# EAGLE board Rocket_prototype (EAGLE 9.6.2)
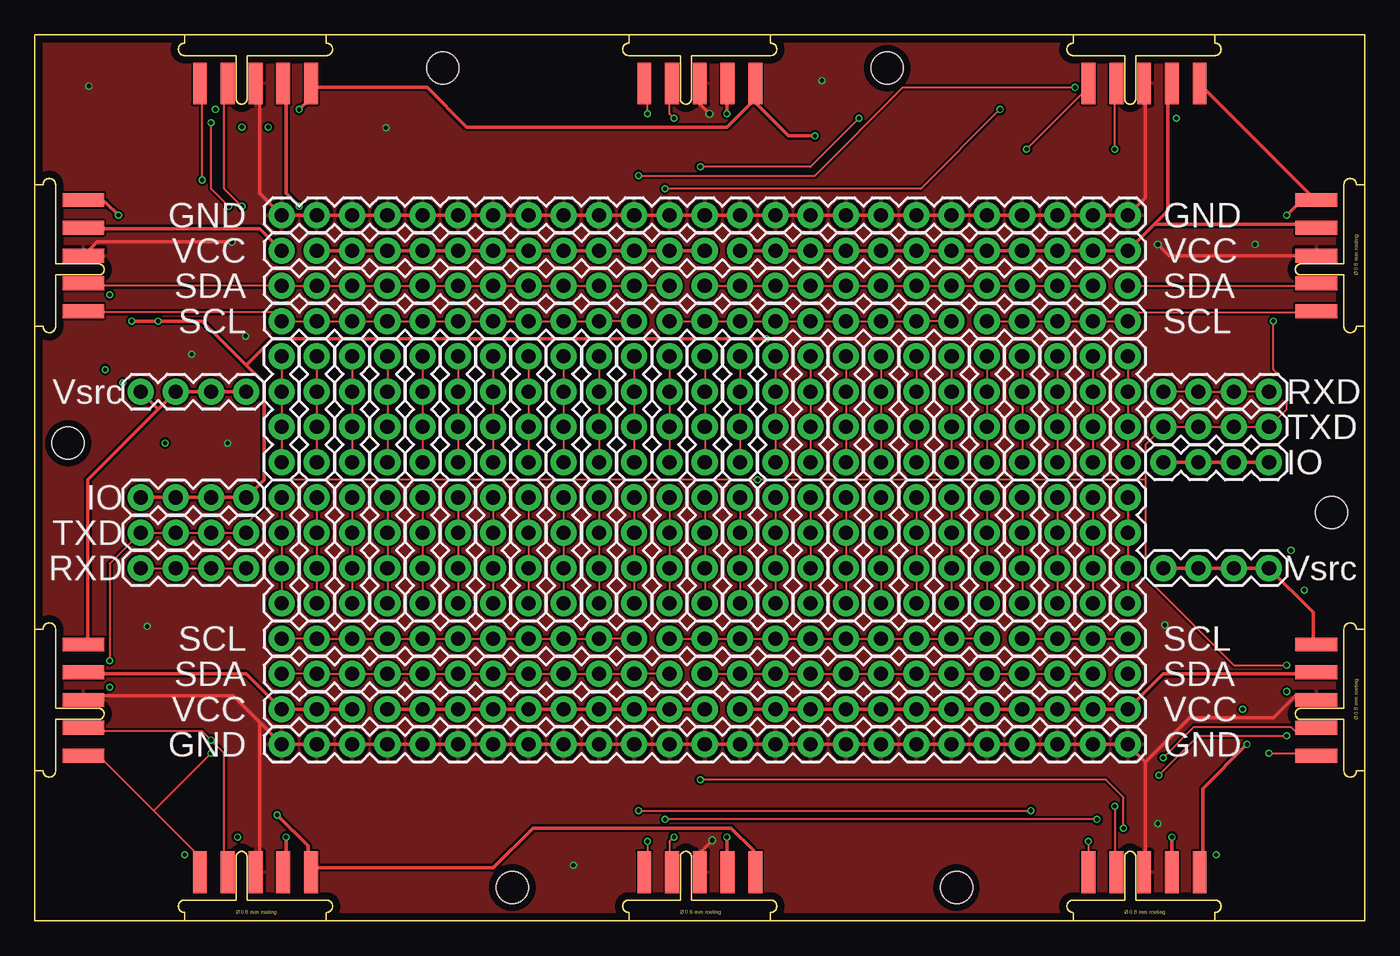
[diagram p0: board, top side]
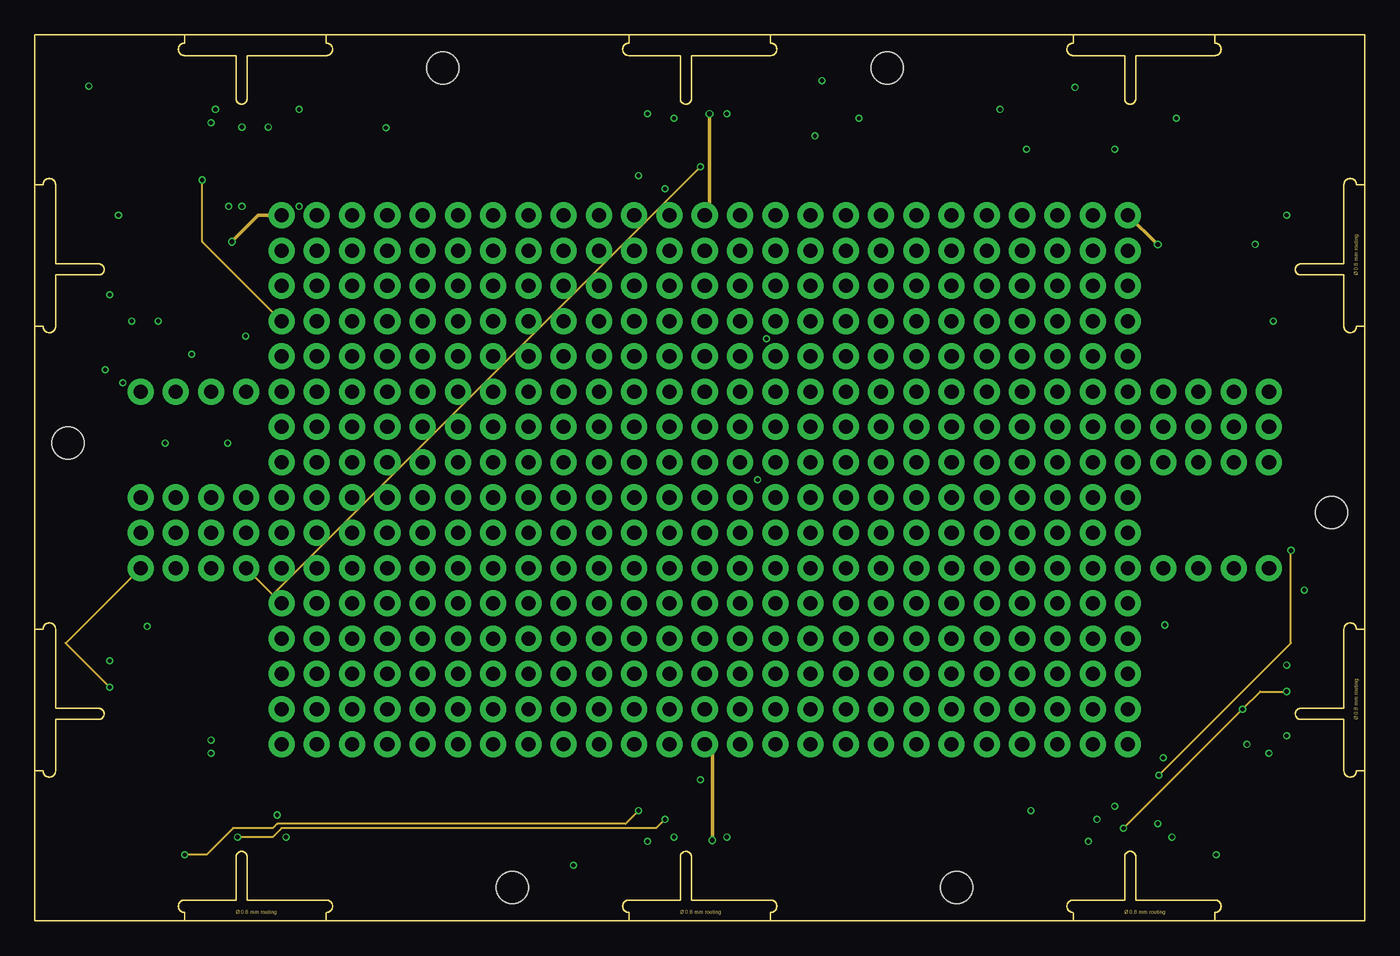
[diagram p1: board, inner layer Route2]
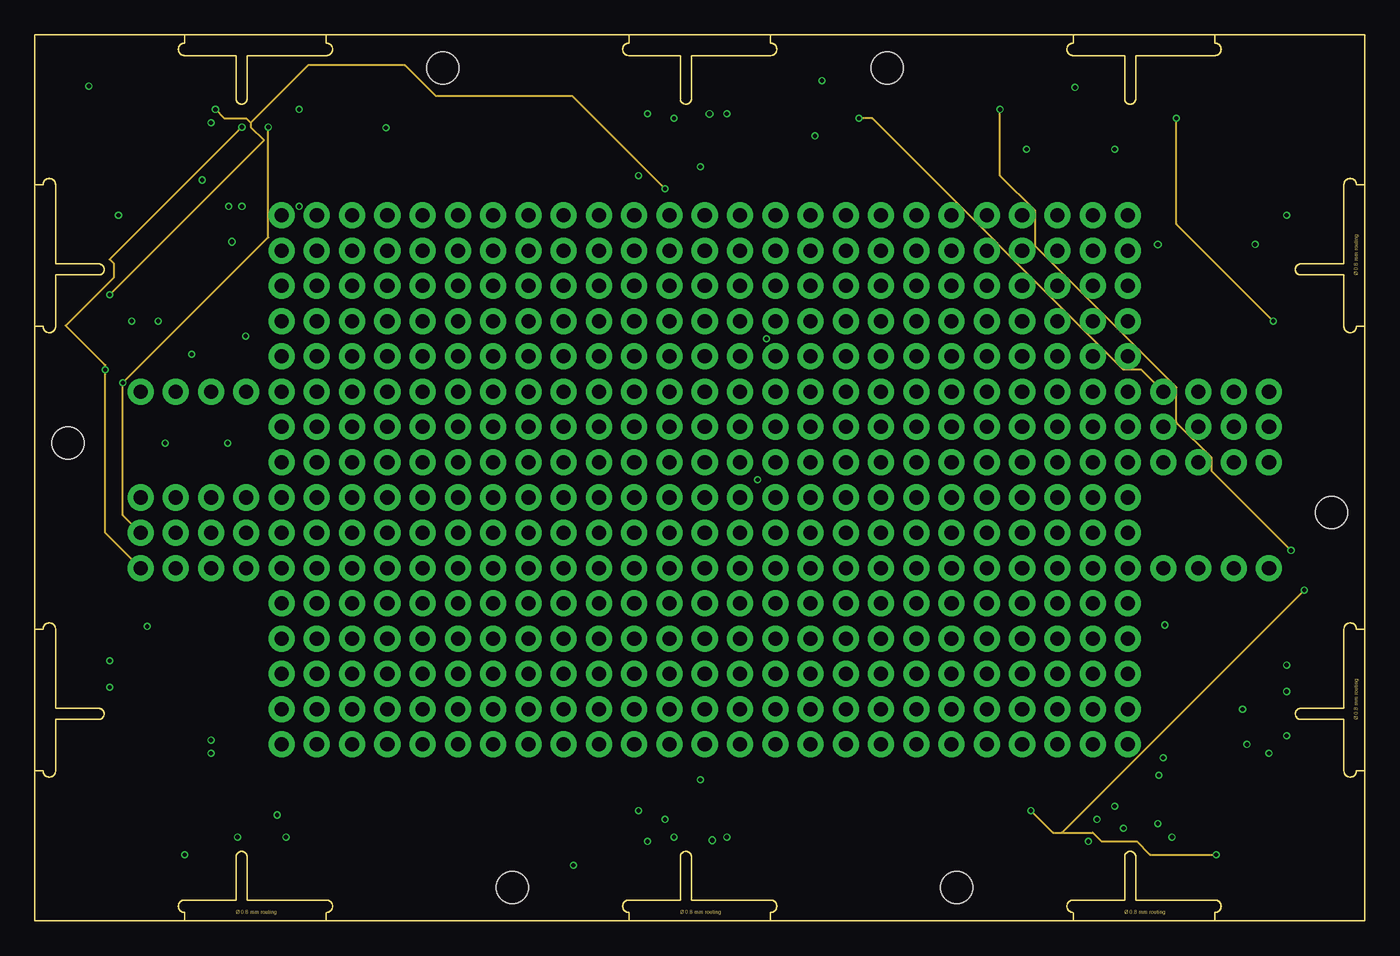
[diagram p2: board, inner layer Route15]
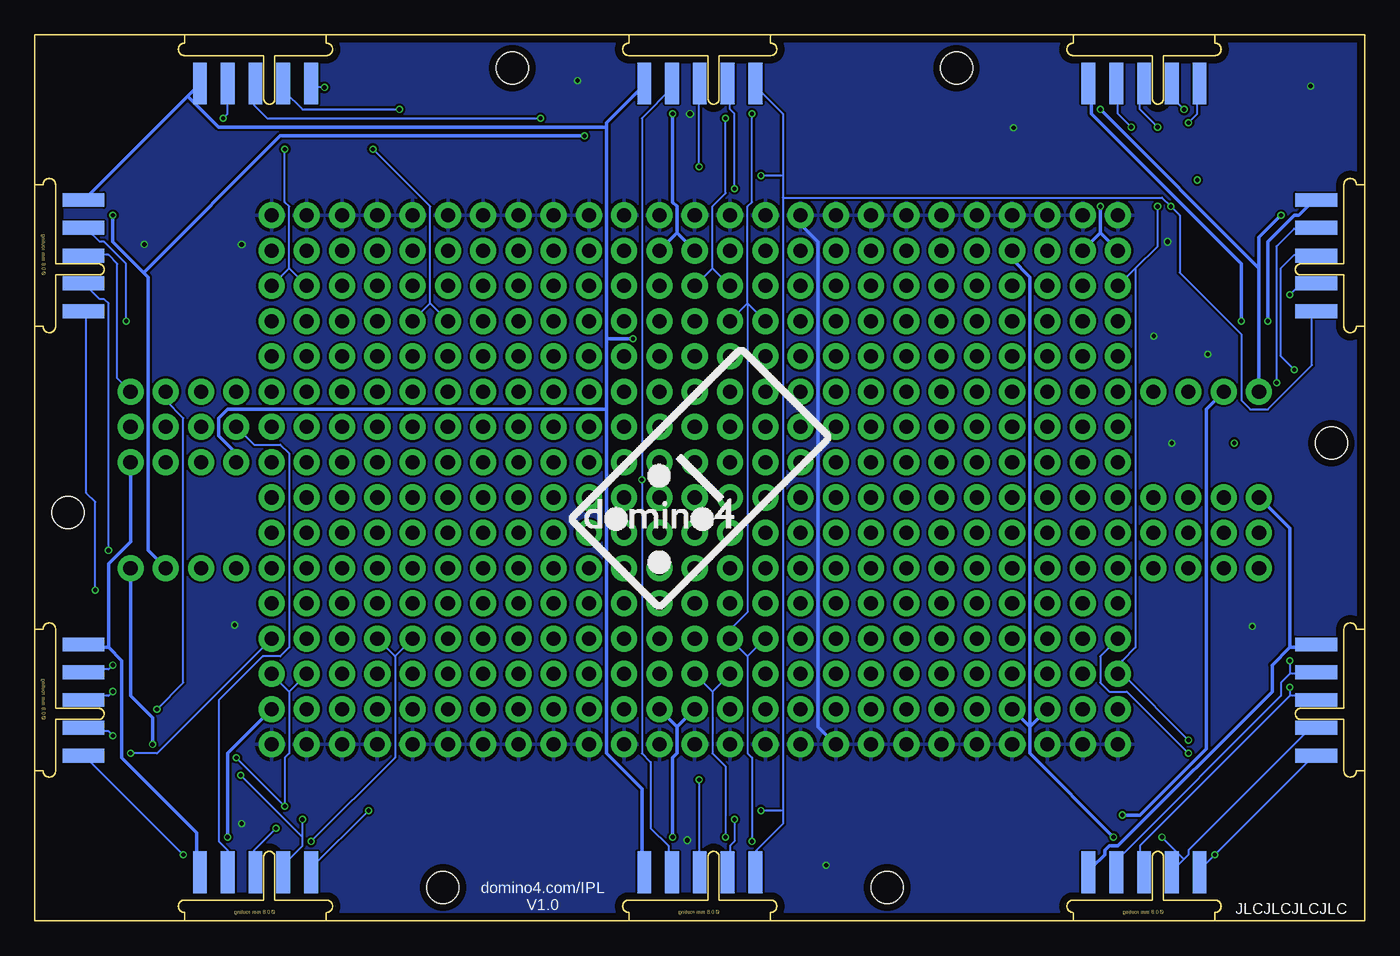
[diagram p3: board, bottom side, seen from below]

Size 95.8 x 63.8 mm. Coordinates in mm from the lower left corner, seen from the top.
Outline: 0,10.8 0,0 10.8,0
Outline: 21,0 42.8,0
Outline: 53,0 74.8,0
Outline: 85,0 95.8,0 95.8,10.8
Outline: 95.8,21 95.8,42.8
Outline: 95.8,53 95.8,63.8 85,63.8
Outline: 74.8,63.8 53,63.8
Outline: 42.8,63.8 21,63.8
Outline: 10.8,63.8 0,63.8 0,53
Outline: 0,42.8 0,21
Copper layers (1+2*15+16): Top 0.035mm / dielectric 0.2mm / Route2 0.0175mm / dielectric 1.065mm / Route15 0.0175mm / dielectric 0.2mm / Bottom 0.035mm
Design rules "jlcpcb4layer": minimum track width 3.5mil, minimum drill 12mil, track to track 3.5mil, track to pad 3.5mil, pad to pad 5mil, via to via 5mil, smd to smd 5mil, copper to edge 20mil, drill to drill 6mil, minimum pad ring 6mil, minimum via ring 4mil, stop-mask expansion 4mil, vias tented up to drill 12mil, thermal gap 10mil
Net classes: 0 default: width 0.152 mm, drill 0.305 mm, clearance 0.152 mm; 1 pwr: width 0.254 mm, drill 0.305 mm, clearance 0.152 mm
Holes 2.3 mm at 29.4,61.4 2.4,34.4 34.4,2.4 66.4,2.4 93.4,29.4 61.4,61.4
vRestrict: area 1,21.8 to 3.7,22.4
Milling: 4 lines

## Footprints (pad centres in the part's own frame; a part is rotated, then mirrored left to right if it is on the bottom)
1X04 = drill 1.016 pad 1.88: 1 0,0; 2 2.54,0; 3 5.08,0; 4 7.62,0
1X25 = drill 1.016 pad 1.88: 1 0,0; 2 2.54,0; 3 5.08,0; 4 7.62,0; 5 10.16,0; 6 12.7,0; 7 15.24,0; 8 17.78,0; 9 20.32,0; 10 22.86,0; 11 25.4,0; 12 27.94,0; 13 30.48,0; 14 33.02,0; 15 35.56,0; 16 38.1,0; 17 40.64,0; 18 43.18,0; 19 45.72,0; 20 48.26,0; 21 50.8,0; 22 53.34,0; 23 55.88,0; 24 58.42,0; 25 60.96,0
XIX_SINGLE_CON_RIGHT = smd 1 x 3: GND@4 0,-3.5; SCL@4 4,-3.5; SDA@4 2,-3.5; VBAT@4 -4,-3.5; VCC@4 -2,-3.5 | smd 1 x 3 bottom: PROG@8 2,-3.5; RESET@8 4,-3.5; RXD@8 0,-3.5; TXD@8 -2,-3.5; VRAW@8 -4,-3.5
XIX_SINGLE_CON_LEFT = smd 1 x 3: GND@1 0,-3.5; SCL@1 -4,-3.5; SDA@1 -2,-3.5; VBAT@1 4,-3.5; VCC@1 2,-3.5 | smd 1 x 3 bottom: PROG@2 -2,-3.5; RESET@2 -4,-3.5; RXD@2 0,-3.5; TXD@2 2,-3.5; VRAW@2 4,-3.5

## Placement (x,y rotation side)
J1  [1X04]  33.02,33.02 90 top
J2  [1X25]  17.78,48.26 0 top
J3  [1X04]  22.86,33.02 90 top
J4  [1X04]  38.1,33.02 90 top
J5  [1X04]  43.18,33.02 90 top
J6  [1X04]  48.26,33.02 90 top
J7  [1X04]  53.34,33.02 90 top
J8  [1X04]  58.42,33.02 90 top
J9  [1X04]  63.5,33.02 90 top
J10  [1X04]  68.58,33.02 90 top
J11  [1X04]  17.78,33.02 90 top
J12  [1X04]  20.32,33.02 90 top
J13  [1X04]  25.4,33.02 90 top
J14  [1X04]  40.64,33.02 90 top
J15  [1X04]  45.72,33.02 90 top
J16  [1X04]  50.8,33.02 90 top
J17  [1X04]  55.88,33.02 90 top
J18  [1X04]  60.96,33.02 90 top
J19  [1X04]  66.04,33.02 90 top
J20  [1X04]  71.12,33.02 90 top
J21  [1X04]  27.94,33.02 90 top
J22  [1X04]  30.48,33.02 90 top
J23  [1X04]  25.4,22.86 90 top
J24  [1X04]  30.48,22.86 90 top
J25  [1X04]  35.56,22.86 90 top
J26  [1X04]  40.64,22.86 90 top
J27  [1X04]  45.72,22.86 90 top
J28  [1X04]  22.86,22.86 90 top
J29  [1X04]  50.8,22.86 90 top
J30  [1X04]  27.94,22.86 90 top
J31  [1X04]  55.88,22.86 90 top
J32  [1X04]  33.02,22.86 90 top
J33  [1X04]  60.96,22.86 90 top
J34  [1X04]  38.1,22.86 90 top
J35  [1X04]  66.04,22.86 90 top
J36  [1X04]  43.18,22.86 90 top
J37  [1X04]  71.12,22.86 90 top
J38  [1X04]  48.26,22.86 90 top
J39  [1X04]  76.2,22.86 90 top
J40  [1X04]  53.34,22.86 90 top
J41  [1X04]  17.78,22.86 90 top
J42  [1X04]  58.42,22.86 90 top
J43  [1X04]  20.32,22.86 90 top
J44  [1X04]  63.5,22.86 90 top
J45  [1X04]  35.56,33.02 90 top
J46  [1X04]  68.58,22.86 90 top
J47  [1X04]  73.66,33.02 90 top
J48  [1X04]  73.66,22.86 90 top
J49  [1X04]  78.74,33.02 90 top
J50  [1X04]  78.74,22.86 90 top
J51  [1X04]  76.2,33.02 90 top
J52  [1X25]  17.78,15.24 0 top
J53  [1X25]  17.78,12.7 0 top
J54  [1X25]  17.78,50.8 0 top
J55  [1X25]  17.78,45.72 0 top
J56  [1X25]  17.78,17.78 0 top
J57  [1X25]  17.78,43.18 0 top
J58  [1X25]  17.78,20.32 0 top
J61  [1X04]  7.62,30.48 0 top
J62  [1X04]  7.62,38.1 0 top
J63  [1X04]  7.62,27.94 0 top
J64  [1X04]  7.62,25.4 0 top
J67  [1X04]  81.28,33.02 0 top
J68  [1X04]  81.28,25.4 0 top
J69  [1X04]  81.28,35.56 0 top
J70  [1X04]  81.28,38.1 0 top
U$3  [JLCPCB-ORDER-NO]  5.28,0.88 0 bottom
U$5  DOMINO4_LOGO  [DOMINO4_LOGO]  47.9,31.9 0 bottom
XIX2  XIX_SINGLE_CONRIGHT  [XIX_SINGLE_CON_RIGHT]  15.9,0 180 top
XIX3  XIX_SINGLE_CONRIGHT  [XIX_SINGLE_CON_RIGHT]  47.9,0 180 top
XIX4  XIX_SINGLE_CONRIGHT  [XIX_SINGLE_CON_RIGHT]  79.9,0 180 top
XIX5  XIX_SINGLE_CONRIGHT  [XIX_SINGLE_CON_RIGHT]  95.8,15.9 270 top
XIX6  XIX_SINGLE_CONRIGHT  [XIX_SINGLE_CON_RIGHT]  95.8,47.9 270 top
XIX7  XIX_SINGLE_CONLEFT  [XIX_SINGLE_CON_LEFT]  0,15.9 90 top
XIX8  XIX_SINGLE_CONLEFT  [XIX_SINGLE_CON_LEFT]  0,47.9 90 top
XIX9  XIX_SINGLE_CONLEFT  [XIX_SINGLE_CON_LEFT]  15.9,63.8 0 top
XIX10  XIX_SINGLE_CONLEFT  [XIX_SINGLE_CON_LEFT]  47.9,63.8 0 top
XIX11  XIX_SINGLE_CONLEFT  [XIX_SINGLE_CON_LEFT]  79.9,63.8 0 top

## Library data of the parts
J1 J3-J51 J61-J64 J67-J70 = SparkFun-Connectors; PROD_ID: CONN-09696
J2 J52-J58 = SparkFun-Connectors
U$3 = X15
U$5 = 24mm
XIX2-XIX11 = XiX-xBUS

## Nets
GND [pwr]: J53.1 J53.2 J53.3 J53.4 J53.5 J53.6 J53.7 J53.8 J53.9 J53.10 J53.11 J53.12 J53.13 J53.14 J53.15 J53.16 J53.17 J53.18 J53.19 J53.20 J53.21 J53.22 J53.23 J53.24 J53.25 J54.1 J54.2 J54.3 J54.4 J54.5 J54.6 J54.7 J54.8 J54.9 J54.10 J54.11 J54.12 J54.13 J54.14 J54.15 J54.16 J54.17 J54.18 J54.19 J54.20 J54.21 J54.22 J54.23 J54.24 J54.25 XIX2.GND@4 XIX3.GND@4 XIX4.GND@4 XIX5.GND@4 XIX6.GND@4 XIX7.GND@1 XIX8.GND@1 XIX9.GND@1 XIX10.GND@1 XIX11.GND@1
N$1: J1.1 J1.2 J1.3 J1.4
N$3: J3.1 J3.2 J3.3 J3.4
N$4: J4.1 J4.2 J4.3 J4.4
N$5: J5.1 J5.2 J5.3 J5.4
N$6: J6.1 J6.2 J6.3 J6.4
N$7: J7.1 J7.2 J7.3 J7.4
N$8: J8.1 J8.2 J8.3 J8.4
N$9: J9.1 J9.2 J9.3 J9.4
N$10: J10.1 J10.2 J10.3 J10.4
N$11: J11.1 J11.2 J11.3 J11.4
N$12: J12.1 J12.2 J12.3 J12.4
N$13: J13.1 J13.2 J13.3 J13.4
N$14: J14.1 J14.2 J14.3 J14.4
N$15: J15.1 J15.2 J15.3 J15.4
N$16: J16.1 J16.2 J16.3 J16.4
N$17: J17.1 J17.2 J17.3 J17.4
N$18: J18.1 J18.2 J18.3 J18.4
N$19: J19.1 J19.2 J19.3 J19.4
N$20: J20.1 J20.2 J20.3 J20.4
N$21: J21.1 J21.2 J21.3 J21.4
N$22: J22.1 J22.2 J22.3 J22.4
N$23: J23.1 J23.2 J23.3 J23.4
N$24: J24.1 J24.2 J24.3 J24.4
N$25: J25.1 J25.2 J25.3 J25.4
N$26: J26.1 J26.2 J26.3 J26.4
N$27: J27.1 J27.2 J27.3 J27.4
N$28: J28.1 J28.2 J28.3 J28.4
N$29: J29.1 J29.2 J29.3 J29.4
N$30: J30.1 J30.2 J30.3 J30.4
N$31: J31.1 J31.2 J31.3 J31.4
N$32: J32.1 J32.2 J32.3 J32.4
N$33: J33.1 J33.2 J33.3 J33.4
N$34: J34.1 J34.2 J34.3 J34.4
N$35: J35.1 J35.2 J35.3 J35.4
N$36: J36.1 J36.2 J36.3 J36.4
N$37: J37.1 J37.2 J37.3 J37.4
N$38: J38.1 J38.2 J38.3 J38.4
N$39: J39.1 J39.2 J39.3 J39.4
N$40: J40.1 J40.2 J40.3 J40.4
N$41: J41.1 J41.2 J41.3 J41.4
N$42: J42.1 J42.2 J42.3 J42.4
N$43: J43.1 J43.2 J43.3 J43.4
N$44: J44.1 J44.2 J44.3 J44.4
N$45: J45.1 J45.2 J45.3 J45.4
N$46: J46.1 J46.2 J46.3 J46.4
N$47: J47.1 J47.2 J47.3 J47.4
N$48: J48.1 J48.2 J48.3 J48.4
N$49: J49.1 J49.2 J49.3 J49.4
N$50: J50.1 J50.2 J50.3 J50.4
N$51: J51.1 J51.2 J51.3 J51.4
PROG: XIX2.PROG@8 XIX3.PROG@8 XIX4.PROG@8 XIX5.PROG@8 XIX6.PROG@8 XIX7.PROG@2 XIX8.PROG@2 XIX9.PROG@2 XIX10.PROG@2 XIX11.PROG@2
RESET: XIX2.RESET@8 XIX3.RESET@8 XIX4.RESET@8 XIX5.RESET@8 XIX6.RESET@8 XIX7.RESET@2 XIX8.RESET@2 XIX9.RESET@2 XIX10.RESET@2 XIX11.RESET@2
RXD: J64.1 J64.2 J64.3 J64.4 J70.1 J70.2 J70.3 J70.4 XIX2.RXD@8 XIX3.RXD@8 XIX4.RXD@8 XIX5.RXD@8 XIX6.RXD@8 XIX7.RXD@2 XIX8.RXD@2 XIX9.RXD@2 XIX10.RXD@2 XIX11.RXD@2
SCL: J57.1 J57.2 J57.3 J57.4 J57.5 J57.6 J57.7 J57.8 J57.9 J57.10 J57.11 J57.12 J57.13 J57.14 J57.15 J57.16 J57.17 J57.18 J57.19 J57.20 J57.21 J57.22 J57.23 J57.24 J57.25 J58.1 J58.2 J58.3 J58.4 J58.5 J58.6 J58.7 J58.8 J58.9 J58.10 J58.11 J58.12 J58.13 J58.14 J58.15 J58.16 J58.17 J58.18 J58.19 J58.20 J58.21 J58.22 J58.23 J58.24 J58.25 XIX2.SCL@4 XIX3.SCL@4 XIX4.SCL@4 XIX5.SCL@4 XIX6.SCL@4 XIX7.SCL@1 XIX8.SCL@1 XIX9.SCL@1 XIX10.SCL@1 XIX11.SCL@1
SDA: J55.1 J55.2 J55.3 J55.4 J55.5 J55.6 J55.7 J55.8 J55.9 J55.10 J55.11 J55.12 J55.13 J55.14 J55.15 J55.16 J55.17 J55.18 J55.19 J55.20 J55.21 J55.22 J55.23 J55.24 J55.25 J56.1 J56.2 J56.3 J56.4 J56.5 J56.6 J56.7 J56.8 J56.9 J56.10 J56.11 J56.12 J56.13 J56.14 J56.15 J56.16 J56.17 J56.18 J56.19 J56.20 J56.21 J56.22 J56.23 J56.24 J56.25 XIX2.SDA@4 XIX3.SDA@4 XIX4.SDA@4 XIX5.SDA@4 XIX6.SDA@4 XIX7.SDA@1 XIX8.SDA@1 XIX9.SDA@1 XIX10.SDA@1 XIX11.SDA@1
TXD: J63.1 J63.2 J63.3 J63.4 J69.1 J69.2 J69.3 J69.4 XIX2.TXD@8 XIX3.TXD@8 XIX4.TXD@8 XIX5.TXD@8 XIX6.TXD@8 XIX7.TXD@2 XIX8.TXD@2 XIX9.TXD@2 XIX10.TXD@2 XIX11.TXD@2
VCC [pwr]: J2.1 J2.2 J2.3 J2.4 J2.5 J2.6 J2.7 J2.8 J2.9 J2.10 J2.11 J2.12 J2.13 J2.14 J2.15 J2.16 J2.17 J2.18 J2.19 J2.20 J2.21 J2.22 J2.23 J2.24 J2.25 J52.1 J52.2 J52.3 J52.4 J52.5 J52.6 J52.7 J52.8 J52.9 J52.10 J52.11 J52.12 J52.13 J52.14 J52.15 J52.16 J52.17 J52.18 J52.19 J52.20 J52.21 J52.22 J52.23 J52.24 J52.25 XIX2.VCC@4 XIX3.VCC@4 XIX4.VCC@4 XIX5.VCC@4 XIX6.VCC@4 XIX7.VCC@1 XIX8.VCC@1 XIX9.VCC@1 XIX10.VCC@1 XIX11.VCC@1
VIN [pwr]: J61.1 J61.2 J61.3 J61.4 J67.1 J67.2 J67.3 J67.4 XIX2.VRAW@8 XIX3.VRAW@8 XIX4.VRAW@8 XIX5.VRAW@8 XIX6.VRAW@8 XIX7.VRAW@2 XIX8.VRAW@2 XIX9.VRAW@2 XIX10.VRAW@2 XIX11.VRAW@2
VSRC [pwr]: J62.1 J62.2 J62.3 J62.4 J68.1 J68.2 J68.3 J68.4 XIX2.VBAT@4 XIX3.VBAT@4 XIX4.VBAT@4 XIX5.VBAT@4 XIX6.VBAT@4 XIX7.VBAT@1 XIX8.VBAT@1 XIX9.VBAT@1 XIX10.VBAT@1 XIX11.VBAT@1

## Tracks (layer width: path | path; a pad name or v marks a point on that pad's centre or on a via)
GND  (via drill 0.3, 0.35)
  Top 0.254: XIX11.GND@1 80.01,60.01 80.01,52.07 J54.25 J54.24 J54.23 J54.22 J54.21 J54.20 J54.19 J54.18 J54.17 J54.16 J54.15 J54.14 J54.13 J54.12 J54.11 J54.10 J54.9 J54.8 J54.7 J54.6 J54.5 J54.4 J54.3 J54.2 J54.1 16.19,52.39 16.19,60.01 XIX9.GND@1 | 80.01,11.43 80.01,3.81 XIX4.GND@4 | 80.01,11.43 J53.25 J53.24 J53.23 J53.22 J53.21 J53.20 J53.19 J53.18 J53.17 J53.16 J53.15 J53.14 J53.13 J53.12 J53.11 J53.10 J53.9 J53.8 J53.7 J53.6 J53.5 J53.4 J53.3 J53.2 J53.1 16.19,14.29 | 80.01,11.43 83.19,14.61 89.22,14.61 90.81,16.19 92.08,16.19 XIX5.GND@4 | 16.19,14.29 14.29,16.19 3.81,16.19 XIX7.GND@1 | 16.19,14.29 16.19,3.81 XIX2.GND@4 | XIX10.GND@1 47.9,58.8 v48.6,58.1 | XIX6.GND@4 81.7,47.9 v80.9,48.7 | XIX3.GND@4 47.9,4.9 v48.8,5.8 | XIX8.GND@1 4.5,48.9 v14.2,48.9
  Route2 0.254: v48.6,58.1 48.6,51.14 J54.13 | v80.9,48.7 80.84,48.7 J54.25 | v48.8,5.8 48.8,12.16 J53.13 | v14.2,48.9 16.1,50.8 J54.1
  Bottom 0.254: J54.10 40.64,50.16 39.37,48.9 39.37,13.97 J53.9
  other vias: 13.9,34.4 15.2,42.1 11.3,40.8 38.8,4 25.3,57.1 8.1,21.2 3.9,60.1 56.7,60.5 80.9,7 87.9,48.7 81.4,21.3
  pour Top: 0,63.8 95.8,63.8 95.8,0 0,0
  pour Bottom: 0,63.8 95.8,63.8 95.8,0 0,0
N$1
  Top 0.152: J1.1 J1.2 J1.3 J1.4
N$3
  Top 0.152: J3.1 J3.2 J3.3 J3.4
N$4
  Top 0.152: J4.1 J4.2 J4.3 J4.4
N$5
  Top 0.152: J5.1 J5.2 J5.3 J5.4
N$6
  Top 0.152: J6.1 J6.2 J6.3 J6.4
N$7
  Top 0.152: J7.1 J7.2 J7.3 J7.4
N$8
  Top 0.152: J8.1 J8.2 J8.3 J8.4
N$9
  Top 0.152: J9.1 J9.2 J9.3 J9.4
N$10
  Top 0.152: J10.1 J10.2 J10.3 J10.4
N$11
  Top 0.152: J11.1 J11.2 J11.3 J11.4
N$12
  Top 0.152: J12.1 J12.2 J12.3 J12.4
N$13
  Top 0.152: J13.1 J13.2 J13.3 J13.4
N$14
  Top 0.152: J14.1 J14.2 J14.3 J14.4
N$15
  Top 0.152: J15.1 J15.2 J15.3 J15.4
N$16
  Top 0.152: J16.1 J16.2 J16.3 J16.4
N$17
  Top 0.152: J17.1 J17.2 J17.3 J17.4
N$18
  Top 0.152: J18.1 J18.2 J18.3 J18.4
N$19
  Top 0.152: J19.1 J19.2 J19.3 J19.4
N$20
  Top 0.152: J20.1 J20.2 J20.3 J20.4
N$21
  Top 0.152: J21.1 J21.2 J21.3 J21.4
N$22
  Top 0.152: J22.1 J22.2 J22.3 J22.4
N$23
  Top 0.152: J23.1 J23.2 J23.3 J23.4
N$24
  Top 0.152: J24.1 J24.2 J24.3 J24.4
N$25
  Top 0.152: J25.1 J25.2 J25.3 J25.4
N$26
  Top 0.152: J26.1 J26.2 J26.3 J26.4
N$27
  Top 0.152: J27.1 J27.2 J27.3 J27.4
N$28
  Top 0.152: J28.1 J28.2 J28.3 J28.4
N$29
  Top 0.152: J29.1 J29.2 J29.3 J29.4
N$30
  Top 0.152: J30.1 J30.2 J30.3 J30.4
N$31
  Top 0.152: J31.1 J31.2 J31.3 J31.4
N$32
  Top 0.152: J32.1 J32.2 J32.3 J32.4
N$33
  Top 0.152: J33.1 J33.2 J33.3 J33.4
N$34
  Top 0.152: J34.1 J34.2 J34.3 J34.4
N$35
  Top 0.152: J35.1 J35.2 J35.3 J35.4
N$36
  Top 0.152: J36.1 J36.2 J36.3 J36.4
N$37
  Top 0.152: J37.1 J37.2 J37.3 J37.4
N$38
  Top 0.152: J38.1 J38.2 J38.3 J38.4
N$39
  Top 0.152: J39.1 J39.2 J39.3 J39.4
N$40
  Top 0.152: J40.1 J40.2 J40.3 J40.4
N$41
  Top 0.152: J41.1 J41.2 J41.3 J41.4
N$42
  Top 0.152: J42.1 J42.2 J42.3 J42.4
N$43
  Top 0.152: J43.1 J43.2 J43.3 J43.4
N$44
  Top 0.152: J44.1 J44.2 J44.3 J44.4
N$45
  Top 0.152: J45.1 J45.2 J45.3 J45.4
N$46
  Top 0.152: J46.1 J46.2 J46.3 J46.4
N$47
  Top 0.152: J47.1 J47.2 J47.3 J47.4
N$48
  Top 0.152: J48.1 J48.2 J48.3 J48.4
N$49
  Top 0.152: J49.1 J49.2 J49.3 J49.4
N$50
  Top 0.152: J50.1 J50.2 J50.3 J50.4
N$51
  Top 0.152: J51.1 J51.2 J51.3 J51.4
N$53  (via drill 0.3)
  other vias: 9.4,34.4
PROG  (via drill 0.3)
  Top 0.152: v45.4,52.7 63.82,52.7 v69.53,58.42 | v76.52,7.3 v45.4,7.3 | v90.17,13.34 83.82,13.34 v80.96,10.48
  Route2 0.152: v90.49,26.67 90.49,20 v80.96,10.48 | v14.61,6.03 17.14,6.03 17.78,6.67 44.77,6.67 v45.4,7.3
  Route15 0.152: v5.4,45.09 16.51,56.2 15.56,57.15 15.56,57.47 | 15.56,57.47 15.24,57.78 13.65,57.78 v13.02,58.42 | 15.56,57.47 19.68,61.59 26.67,61.59 28.89,59.37 38.73,59.37 v45.4,52.7 | v69.53,58.42 69.53,53.66 72.07,51.12 72.07,48.58 82.23,38.42 82.23,35.88 84.77,33.34 84.77,32.38 v90.49,26.67
  Bottom 0.152: v5.4,45.09 4.76,45.72 3.81,45.72 XIX8.PROG@2 | v13.02,58.42 13.65,59.05 13.65,60.01 XIX9.PROG@2 | v45.4,52.7 45.4,58.1 45.72,58.42 45.72,60.01 XIX10.PROG@2 | v69.53,58.42 76.52,58.42 77.79,59.69 77.79,60.01 XIX11.PROG@2 | 13.02,4.45 12.7,4.76 12.7,5.08 4.13,13.65 3.81,13.65 XIX7.PROG@2 | 13.02,4.45 13.65,3.81 XIX2.PROG@8 | v45.4,7.3 45.4,5.71 45.72,5.4 45.72,3.81 XIX3.PROG@8 | 76.52,6.03 76.52,5.4 77.79,4.13 77.79,3.81 XIX4.PROG@8 | 76.52,6.03 v76.52,7.3 | v90.17,13.34 90.49,13.65 92.08,13.65 XIX5.PROG@8 | 76.52,6.03 v80.96,10.48 | v90.49,26.67 90.49,44.45 90.81,44.77 91.12,44.77 92.08,45.72 XIX6.PROG@8 | v14.61,6.03 13.02,4.45
RESET  (via drill 0.3)
  Top 0.152: v43.5,7.94 v71.75,7.94 | v12.7,57.47 12.7,52.7 v13.97,51.44 | v74.93,60.01 62.55,60.01 56.2,53.66 v43.5,53.66
  Route2 0.152: v10.79,4.76 12.38,4.76 14.29,6.67 17.14,6.67 17.46,6.99 42.55,6.99 v43.5,7.94
  Route15 0.152: v85.09,4.76 80.33,4.76 79.38,5.71 76.83,5.71 76.2,6.35 73.98,6.35 | 73.98,6.35 73.34,6.35 v71.75,7.94 | 73.98,6.35 v91.44,23.81
  Bottom 0.152: XIX2.RESET@8 11.75,3.81 v10.79,4.76 3.81,11.75 XIX7.RESET@2 | 41.91,53.66 41.91,58.1 43.81,60.01 XIX10.RESET@2 | 41.91,53.66 41.91,52.07 | 41.91,52.07 41.91,7.94 | 41.91,7.94 41.91,6.99 43.81,5.08 43.81,3.81 XIX3.RESET@8 | v71.75,7.94 75.88,3.81 XIX4.RESET@8 | 41.91,7.94 v43.5,7.94 | v85.09,4.76 92.08,11.75 XIX5.RESET@8 | 41.91,52.07 14.61,52.07 v13.97,51.44 13.34,50.8 13.34,46.67 8.89,42.23 8.89,37.47 8.26,36.83 6.99,36.83 3.81,40.01 3.81,43.81 XIX8.RESET@2 | v91.44,23.81 91.44,30.16 92.08,30.8 92.08,43.81 XIX6.RESET@8 | v12.7,57.47 12.06,58.1 12.06,60.01 XIX9.RESET@2 | v74.93,60.01 75.88,60.01 XIX11.RESET@2 | 41.91,53.66 v43.5,53.66
RXD  (via drill 0.3)
  Top 0.152: J64.1 J64.2 J64.3 J64.4 | v47.94,54.29 55.88,54.29 v59.37,57.78 | J70.1 J70.2 J70.3 J70.4 | v47.94,10.16 77.15,10.16 78.42,8.89 v78.42,6.67
  Route2 0.152: v5.4,16.83 2.22,20 J64.1 | v90.17,16.51 88.27,16.51 v87,15.24 v78.42,6.67 | J64.4 17.14,23.5 v47.94,54.29
  Route15 0.152: J64.1 5.08,27.94 v5.08,39.69 5.08,40.01 2.22,42.86 5.71,46.35 5.71,47.31 5.4,47.62 v14.92,57.15 | v59.37,57.78 60.33,57.78 78.42,39.69 79.69,39.69 J70.1
  Bottom 0.152: 5.4,16.19 16.19,5.4 16.19,3.81 XIX2.RXD@8 | 5.4,16.19 3.81,16.19 XIX7.RXD@2 | v5.08,39.69 6.03,40.64 6.03,46.99 5.08,47.94 3.81,47.94 XIX8.RXD@2 | v14.92,57.15 16.19,58.42 16.19,60.01 XIX9.RXD@2 | v5.4,16.83 5.4,16.19 | v47.94,54.29 47.94,60.01 XIX10.RXD@2 | v59.37,57.78 79.06,57.78 80.01,58.74 80.01,60.01 XIX11.RXD@2 | J70.4 89.85,39.05 89.85,47.31 90.49,47.94 92.08,47.94 XIX6.RXD@8 | v47.94,10.16 47.94,3.81 XIX3.RXD@8 | v78.42,6.67 80.01,5.08 80.01,3.81 XIX4.RXD@8 | v90.17,16.51 90.49,16.19 92.08,16.19 XIX5.RXD@8 | J70.3 86.36,37.47 85.09,36.2 85.09,17.14 v87,15.24
SCL  (via drill 0.3)
  Top 0.152: 8.57,7.94 11.75,4.76 11.75,3.81 XIX2.SCL@4 | 8.57,7.94 4.76,11.75 3.81,11.75 XIX7.SCL@1 | J58.1 J58.2 J58.3 J58.4 J58.5 J58.6 J58.7 J58.8 J58.9 J58.10 J58.11 | v12.7,12.06 8.57,7.94 | v44.13,5.71 44.13,3.81 XIX3.SCL@4 | J58.12 J58.13 J58.14 J58.15 J58.16 J58.17 J58.18 J58.19 J58.20 J58.21 | v88.9,12.06 92.08,12.06 XIX5.SCL@4 | v75.88,5.71 75.88,3.81 XIX4.SCL@4 | J58.22 J58.23 J58.24 J58.25 | XIX8.SCL@1 3.81,43.81 17.14,43.81 J57.1 J57.2 J57.3 J57.4 J57.5 J57.6 J57.7 J57.8 J57.9 J57.10 J57.11 | v12.06,53.34 12.06,60.01 XIX9.SCL@1 | v44.13,58.1 44.13,60.01 XIX10.SCL@1 | J57.12 J57.13 J57.14 J57.15 J57.16 J57.17 J57.18 J57.19 J57.20 | XIX6.SCL@4 92.08,43.81 79.38,43.81 J57.25 J57.24 J57.23 J57.22 J57.21 | v71.44,55.56 75.88,60.01 XIX11.SCL@1
  Route2 0.152: v12.06,53.34 12.06,48.9 J57.1
  Bottom 0.152: v12.7,12.06 17.14,16.51 18.41,16.51 19.05,17.14 19.05,19.05 J58.1 | v44.13,5.71 44.13,11.75 44.45,12.06 44.45,19.05 | J58.11 44.45,19.05 | 44.45,19.05 J58.12 45.72,20.95 44.45,22.23 44.45,44.45 | v88.9,12.06 87,12.06 J58.25 | v75.88,5.71 69.85,11.75 69.85,19.05 | J58.21 69.85,19.05 | 69.85,19.05 J58.22 | v44.13,58.1 44.13,51.75 44.45,51.44 44.45,44.45 | J57.11 44.45,44.45 | 44.45,44.45 J57.12 | v71.44,55.56 67.31,51.44 67.31,44.45 | J57.20 67.31,44.45 | 67.31,44.45 J57.21
SDA  (via drill 0.3)
  Top 0.152: XIX7.SDA@1 3.81,13.65 12.06,13.65 v12.7,13.02 13.65,12.06 13.65,3.81 XIX2.SDA@4 | J56.1 J56.2 J56.3 J56.4 J56.5 J56.6 J56.7 J56.8 J56.9 J56.10 J56.11 J56.12 | v77.79,8.26 77.79,3.81 XIX4.SDA@4 | v81.28,11.75 83.5,13.97 90.49,13.97 90.81,13.65 92.08,13.65 XIX5.SDA@4 | v46.04,6.03 45.72,5.71 45.72,3.81 XIX3.SDA@4 | J56.13 J56.14 J56.15 J56.16 J56.17 J56.18 J56.19 J56.20 J56.21 J56.22 J56.23 J56.24 | XIX8.SDA@1 3.81,45.72 J55.1 J55.2 J55.3 J55.4 J55.5 J55.6 J55.7 J55.8 J55.9 J55.10 J55.11 J55.12 | v14.92,51.44 13.65,52.7 13.65,60.01 XIX9.SDA@1 | J55.25 92.08,45.72 XIX6.SDA@4 | v77.79,55.56 77.79,60.01 XIX11.SDA@1 | v46.04,57.78 45.72,58.1 45.72,60.01 XIX10.SDA@1 | J55.13 J55.14 J55.15 J55.16 J55.17 J55.18 J55.19 J55.20 J55.21 J55.22 J55.23 J55.24
  Bottom 0.152: 17.46,17.78 v12.7,13.02 | 77.47,16.51 77.47,12.06 77.79,11.75 v77.79,8.26 v81.28,11.75 | J56.24 77.47,16.51 | 77.47,16.51 J56.25 | v46.04,6.03 46.04,11.11 46.99,12.06 46.99,16.51 | J56.12 46.99,16.51 | 46.99,16.51 J56.13 | v14.92,51.44 14.92,48.58 16.51,46.99 | J55.1 16.51,46.99 | v77.79,55.56 77.79,51.75 77.47,51.44 77.47,46.99 | J55.24 77.47,46.99 | 77.47,46.99 J55.25 | v46.04,57.78 46.04,52.39 46.99,51.44 46.99,46.99 | J55.12 46.99,46.99 | 46.99,46.99 J55.13 | 17.46,17.78 17.46,18.73 16.51,19.68 16.51,46.99 | 17.46,17.78 J56.1
TXD  (via drill 0.3)
  Top 0.152: v5.4,18.73 5.4,25.72 J63.1 J63.2 J63.3 J63.4 15.24,28.57 16.51,29.84 16.51,31.11 17.14,31.75 v52.07,31.75 80.01,31.75 | v89.22,43.18 89.22,39.69 90.17,38.73 90.17,36.83 J69.4 J69.3 J69.2 J69.1 80.01,34.29 80.01,31.75 | v90.17,18.41 86.36,18.41 80.01,24.77 80.01,31.75
  Route15 0.152: J63.1 6.35,29.21 v6.35,38.73 16.83,49.21 v16.83,57.15 | v82.23,57.78 82.23,50.16 v89.22,43.18
  Bottom 0.152: 5.4,17.78 6.03,17.14 6.03,16.19 17.78,4.45 17.78,3.81 XIX2.TXD@8 | 5.4,17.78 3.81,17.78 XIX7.TXD@2 | v6.35,38.73 6.35,48.58 5.08,49.85 3.81,49.85 XIX8.TXD@2 | v16.83,57.15 17.78,58.1 17.78,60.01 XIX9.TXD@2 | v5.4,18.73 5.4,17.78 | XIX3.TXD@8 50.16,3.81 50.16,5.4 51.44,6.67 51.44,11.43 52.07,12.06 v52.07,31.75 52.07,57.78 49.85,60.01 XIX10.TXD@2 | v89.22,43.18 89.22,47.31 90.81,48.9 91.12,48.9 92.08,49.85 XIX6.TXD@8 | v82.23,57.78 81.92,58.1 81.92,60.01 XIX11.TXD@2 | J69.1 80.01,34.29 78.11,34.29 77.47,33.66 77.47,19.68 78.11,19.05 79.38,19.05 82.55,15.88 82.55,5.71 81.92,5.08 81.92,3.81 XIX4.TXD@8 | v90.17,18.41 90.49,18.1 92.08,18.1 XIX5.TXD@8
VCC  (via drill 0.3)
  Top 0.254: J2.1 16.19,49.85 3.81,49.85 XIX8.VCC@1 | v19.05,51.44 18.1,52.39 18.1,60.01 XIX9.VCC@1 | J2.2 J2.3 J2.4 J2.5 J2.6 J2.7 J2.8 J2.9 J2.10 J2.11 J2.12 J2.13 | 80.64,50.16 J2.25 J2.24 J2.23 J2.22 J2.21 J2.20 J2.19 J2.18 J2.17 J2.16 J2.15 J2.14 | 80.64,50.16 81.6,51.12 81.6,60.01 XIX11.VCC@1 | 80.64,50.16 92.08,50.16 XIX6.VCC@4 | v49.85,58.1 49.85,60.01 XIX10.VCC@1 | XIX7.VCC@1 3.81,17.78 15.24,17.78 J52.1 J52.2 J52.3 | v18.1,6.03 18.1,3.81 XIX2.VCC@4 | J52.4 J52.5 J52.6 J52.7 J52.8 J52.9 J52.10 J52.11 J52.12 J52.13 | v81.92,6.03 81.92,3.81 XIX4.VCC@4 | XIX5.VCC@4 92.08,17.78 81.28,17.78 J52.25 J52.24 J52.23 J52.22 J52.21 J52.20 J52.19 J52.18 J52.17 J52.16 J52.15 J52.14 | v49.85,6.03 49.85,3.81 XIX3.VCC@4
  Bottom 0.254: 19.05,49.53 v19.05,51.44 | J2.1 19.05,49.53 | 19.05,49.53 J2.2 | v49.85,58.1 49.85,51.75 49.53,51.44 49.53,49.53 | J2.13 49.53,49.53 | 49.53,49.53 J2.14 | v18.1,6.03 24.13,12.06 24.13,13.97 | J52.3 24.13,13.97 | 24.13,13.97 J52.4 | v81.92,6.03 81.92,12.06 J52.25 | v49.85,6.03 49.85,11.75 49.53,12.06 49.53,13.97 | J52.13 49.53,13.97 | 49.53,13.97 J52.14 | J2.4 25.4,47.62 24.13,46.35 24.13,13.97
VIN  (via drill 0.3)
  Top 0.254: J61.1 J61.2 J61.3 J61.4 16.51,31.75 16.51,38.73 15.24,40.01 | v6.99,43.18 v8.89,43.18 12.06,43.18 15.24,40.01 | J67.1 J67.2 J67.3 J67.4 | 15.24,40.01 17.14,41.91 v52.7,41.91
  Bottom 0.254: 5.4,19.68 6.67,18.41 6.67,16.51 17.78,5.4 18.41,5.4 18.73,5.08 18.73,4.76 19.68,3.81 XIX2.VRAW@8 | 5.4,19.68 3.81,19.68 XIX7.VRAW@2 | v6.99,43.18 6.99,48.9 5.08,50.8 4.76,50.8 3.81,51.75 XIX8.VRAW@2 | v8.89,43.18 8.89,47.31 19.68,58.1 19.68,60.01 XIX9.VRAW@2 | 5.4,19.68 5.4,28.26 J61.1 | 90.49,19.68 89.53,18.73 89.53,11.75 84.14,6.35 84.14,3.81 XIX4.VRAW@8 | 90.49,19.68 92.08,19.68 XIX5.VRAW@8 | J67.4 88.9,27.3 90.49,25.72 90.49,19.68 | 84.77,59.37 84.14,60.01 XIX11.VRAW@2 | 84.77,59.37 92.08,52.07 XIX6.VRAW@8 | 54.61,57.15 54.61,57.47 52.07,60.01 XIX10.VRAW@2 | 54.61,57.15 54.61,41.91 | 54.61,41.91 54.61,36.83 | 54.61,36.83 54.61,12.06 52.07,9.53 52.07,3.81 XIX3.VRAW@8 | 84.77,59.37 82.55,57.15 54.61,57.15 | J67.1 81.28,33.66 82.55,34.92 82.55,36.2 81.92,36.83 54.61,36.83 | 54.61,41.91 v52.7,41.91
VSRC  (via drill 0.3)
  Top 0.254: 91.76,52.39 92.08,52.07 XIX6.VBAT@4 91.76,52.39 | 91.76,52.39 84.14,60.01 XIX11.VBAT@1 | J68.1 J68.2 J68.3 J68.4 92.08,22.23 92.08,20 XIX5.VBAT@4 | v87.31,12.7 84.14,9.53 84.14,3.81 XIX4.VBAT@4 | v90.17,50.8 91.76,52.39 | XIX3.VBAT@4 51.75,3.81 51.75,5.08 50.16,6.67 35.88,6.67 33.02,3.81 20,3.81 XIX2.VBAT@4 19.68,3.81 19.68,5.4 v17.46,7.62 | 51.75,59.05 49.85,57.15 31.11,57.15 28.26,60.01 20,60.01 XIX9.VBAT@1 19.68,60.01 19.68,59.05 v19.05,58.42 | 51.75,59.05 51.75,60.01 XIX10.VBAT@1 51.75,59.05 | v6.03,50.8 5.08,51.75 3.81,51.75 XIX8.VBAT@1 | 8.89,36.83 J62.2 J62.3 J62.4 | 8.89,36.83 3.81,31.75 3.81,20 XIX7.VBAT@1 | 8.89,36.83 J62.1 | v56.2,56.52 54.29,56.52 51.75,59.05
  Bottom 0.254: v87.31,12.7 87.31,14.61 88.9,16.19 J68.4 | v90.17,50.8 90.17,48.9 87.95,46.67 | 87.95,46.67 87.63,46.35 87.63,26.67 J68.3 | v6.03,50.8 7.62,49.21 7.62,46.99 | J62.1 7.62,46.99 | 7.62,46.99 v19.05,58.42 | v17.46,7.62 16.19,7.62 11.43,12.38 11.43,36.83 J62.2 | 87.95,46.67 78.11,56.52 v56.2,56.52

## Text on the board
tPlace: GND | GND | VCC | VCC | SDA | SDA | SCL | SCL | Vsrc | RXD | TXD | IO | IO | TXD | RXD | Vsrc | SCL | SCL | SDA | SDA | VCC | VCC | GND | GND
bPlace: domino4.com/IPL / V1.0